# EAGLE board TYPEII (EAGLE 9.6.1)
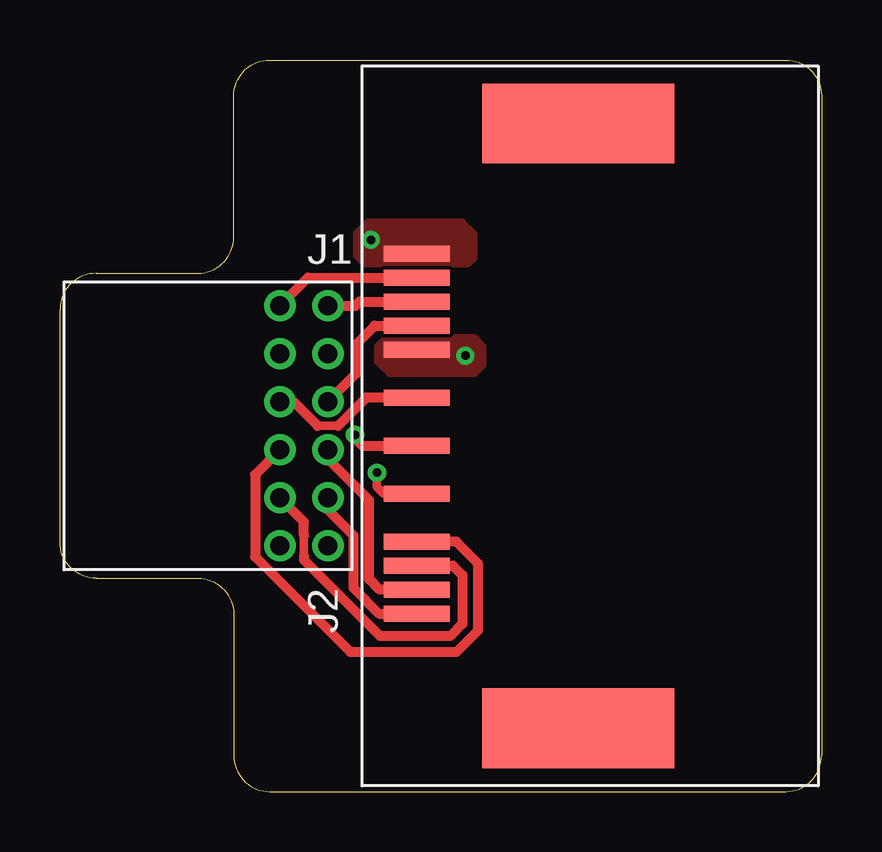
[diagram p0: board, top side]
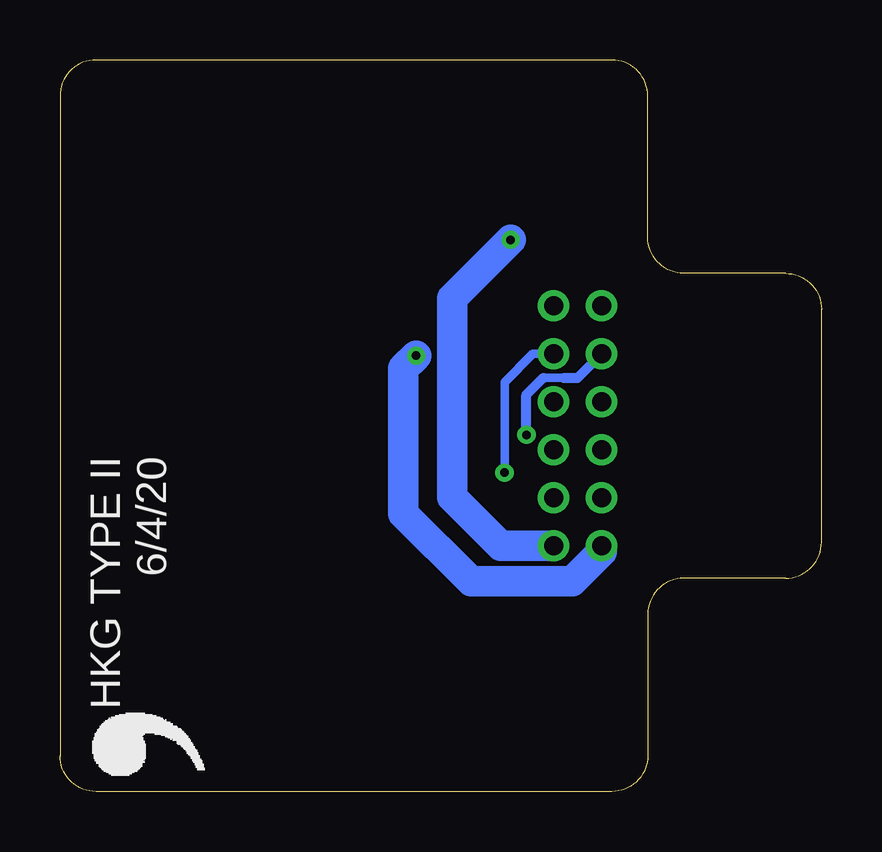
[diagram p1: board, bottom side, seen from below]

Size 31.73 x 30.48 mm. Coordinates in mm from the lower left corner, seen from the top.
Outline: 1.5,8.89 5.74,8.89 arc-90 7.24,7.39 7.24,1.5 arc90 8.74,0 30.23,0 arc90 31.73,1.5 31.73,28.98 arc90 30.23,30.48 8.74,30.48 arc90 7.24,28.98 7.24,23.09 arc-90 5.74,21.59 1.5,21.59 arc90 0,20.09 0,10.39 arc90 1.5,8.89
Copper layers (1*16): Top 0.035mm / dielectric 1.5mm / Bottom 0.035mm
Design rules "default": minimum track width 6mil, minimum drill 0.35mm, track to track 6mil, track to pad 6mil, pad to pad 6mil, via to via 6mil, smd to smd 6mil, copper to edge 40mil, drill to drill 6mil, minimum pad ring 10mil, minimum via ring 8mil, stop-mask expansion 4mil, vias tented up to drill 0mil, thermal gap 10mil

## Footprints (pad centres in the part's own frame; a part is rotated, then mirrored left to right if it is on the bottom)
5018761240 = drill 0.8: P1 5,-1; P2 5,1; P3 3,-1; P4 3,1; P5 1,-1; P6 1,1; P7 -1,-1; P8 -1,1; P9 -3,-1; P10 -3,1; P11 -5,-1; P12 -5,1
MG645845 = smd 0.66 x 2.75: P1 6.17,6.72; P2 4.17,6.72; P3 -5.83,6.72; P4 -7.83,6.72; P5 7.17,6.72; P6 5.17,6.72; P7 3.17,6.72; P8 1.17,6.72; P9 -0.83,6.72; P10 -2.83,6.72; P11 -4.83,6.72; P12 -6.83,6.72 | smd 3.32 x 8: P$1 -12.6,0; P$2 12.6,0

## Placement (x,y rotation side)
FRAME1  FRAME-LETTER-OPENNO_PACKAGE  [DUMMY]  1.27,0 0 top
J1  5018761240  [5018761240]  10.16,15.24 270 top
J2  MG645845  [MG645845]  21.59,15.24 90 top
U$1  [LOGO]  25.4,0 90 bottom

## Library data of the parts
FRAME1 = comma.ai; DESIGNER: Nobody; VERSION: v01
J1 = 5018761440; CPN: CAI-HARNESS-MOLEX-5018761240; MPN: 5018761240
J2 = MG645845; CPN: CAI-HARNESS-KET-MG645845; MPN: MG645845
U$1 = comma.ai

## Nets
CAN0_H: J1.P6 J2.P12
CAN0_L: J1.P4 J2.P4
CAN1_H: J1.P5 J2.P11
CAN1_L: J1.P3 J2.P3
GND: J1.P1 J2.P7
IGN: J1.P2 J2.P5
PT1: J1.P8 J2.P2
PT2: J1.P10 J2.P10
PT3: J1.P12 J2.P6
PT4: J1.P7 J2.P8
PT5: J1.P9 J2.P9
PT6: J1.P11 J2.P1

## Tracks (layer width: path | path; a pad name or v marks a point on that pad's centre or on a via)
CAN0_H
  Top 0.406: J2.P12 13.31,8.41 12.88,8.84 12.88,12.14 11.16,13.86 J1.P6
CAN0_L
  Top 0.406: J1.P4 11.16,11.73 12.22,10.67 12.22,8.48 13.29,7.41 J2.P4
CAN1_H
  Top 0.406: J1.P5 8.13,13.21 8.13,9.78 12.09,5.82 16.53,5.82 17.42,6.71 17.42,9.5 16.51,10.41 J2.P11
CAN1_L
  Top 0.356: 10.16,10.67 10.16,9.81
  Top 0.406: J2.P3 16.37,9.41 16.76,9.02 16.76,6.99 16.26,6.48 13.34,6.48 10.16,9.65 10.16,9.81 | J1.P3 10.16,11.24 10.16,10.67
GND  (via drill 0.35)
  Bottom 1.016: v16.89,18.16 17.02,18.16
  Bottom 1.27: J1.P1 9.16,9.99 10.38,8.76 14.61,8.76 17.42,11.58 17.42,17.63 v16.89,18.16
  pour Top (no thermals): 17.27,18.92 13.59,18.92 13.21,18.54 13.21,17.91 13.72,17.4 17.27,17.4 17.65,17.78 17.65,18.54
IGN  (via drill 0.35)
  Bottom 1.27: J1.P2 13.36,10.24 15.39,12.27 15.39,20.55 v12.95,22.99
  pour Top (no thermals): 12.7,21.97 17.02,21.97 17.27,22.23 17.27,23.24 16.76,23.75 12.83,23.75 12.32,23.24 12.32,22.35
PT1
  Top 0.406: J1.P8 12.34,17.42 12.34,18.64 13.11,19.41 J2.P2
PT2  (via drill 0.35)
  Top 0.356: v13.21,13.28 13.21,12.7 13.5,12.41 J2.P10
  Bottom 0.356: J1.P10 12.03,18.24 13.21,17.06 v13.21,13.28
PT3
  Top 0.406: J1.P12 12.3,20.24 12.47,20.41 J2.P6
PT4
  Top 0.356: 11.59,15.24 10.73,15.24
  Top 0.406: J1.P7 9.73,16.24 10.73,15.24 | J2.P8 12.76,16.41 11.59,15.24
PT5  (via drill 0.35)
  Top 0.406: v12.29,14.86 12.29,14.71 12.59,14.41 J2.P9
  Bottom 0.356: 11.59,17.24 10.73,17.24
  Bottom 0.406: J1.P9 10.16,17.24 10.73,17.24 | v12.29,14.86 12.29,16.53 11.59,17.24
PT6
  Top 0.406: J1.P11 10.33,21.41 J2.P1

## Text on the board
bNames: HKG TYPE II / 6/4/20